# Altium PCB klor1_4.PcbDoc (part 1 of 3)
Units mm, origin at the board's own origin, x right, y up, seen from the top; angles counter-clockwise.
Board outline 323.11 x 118.19 mm, 2 copper layers (Top Layer, Bottom Layer); 176 components, 136 nets, 856 pads, 194 vias.
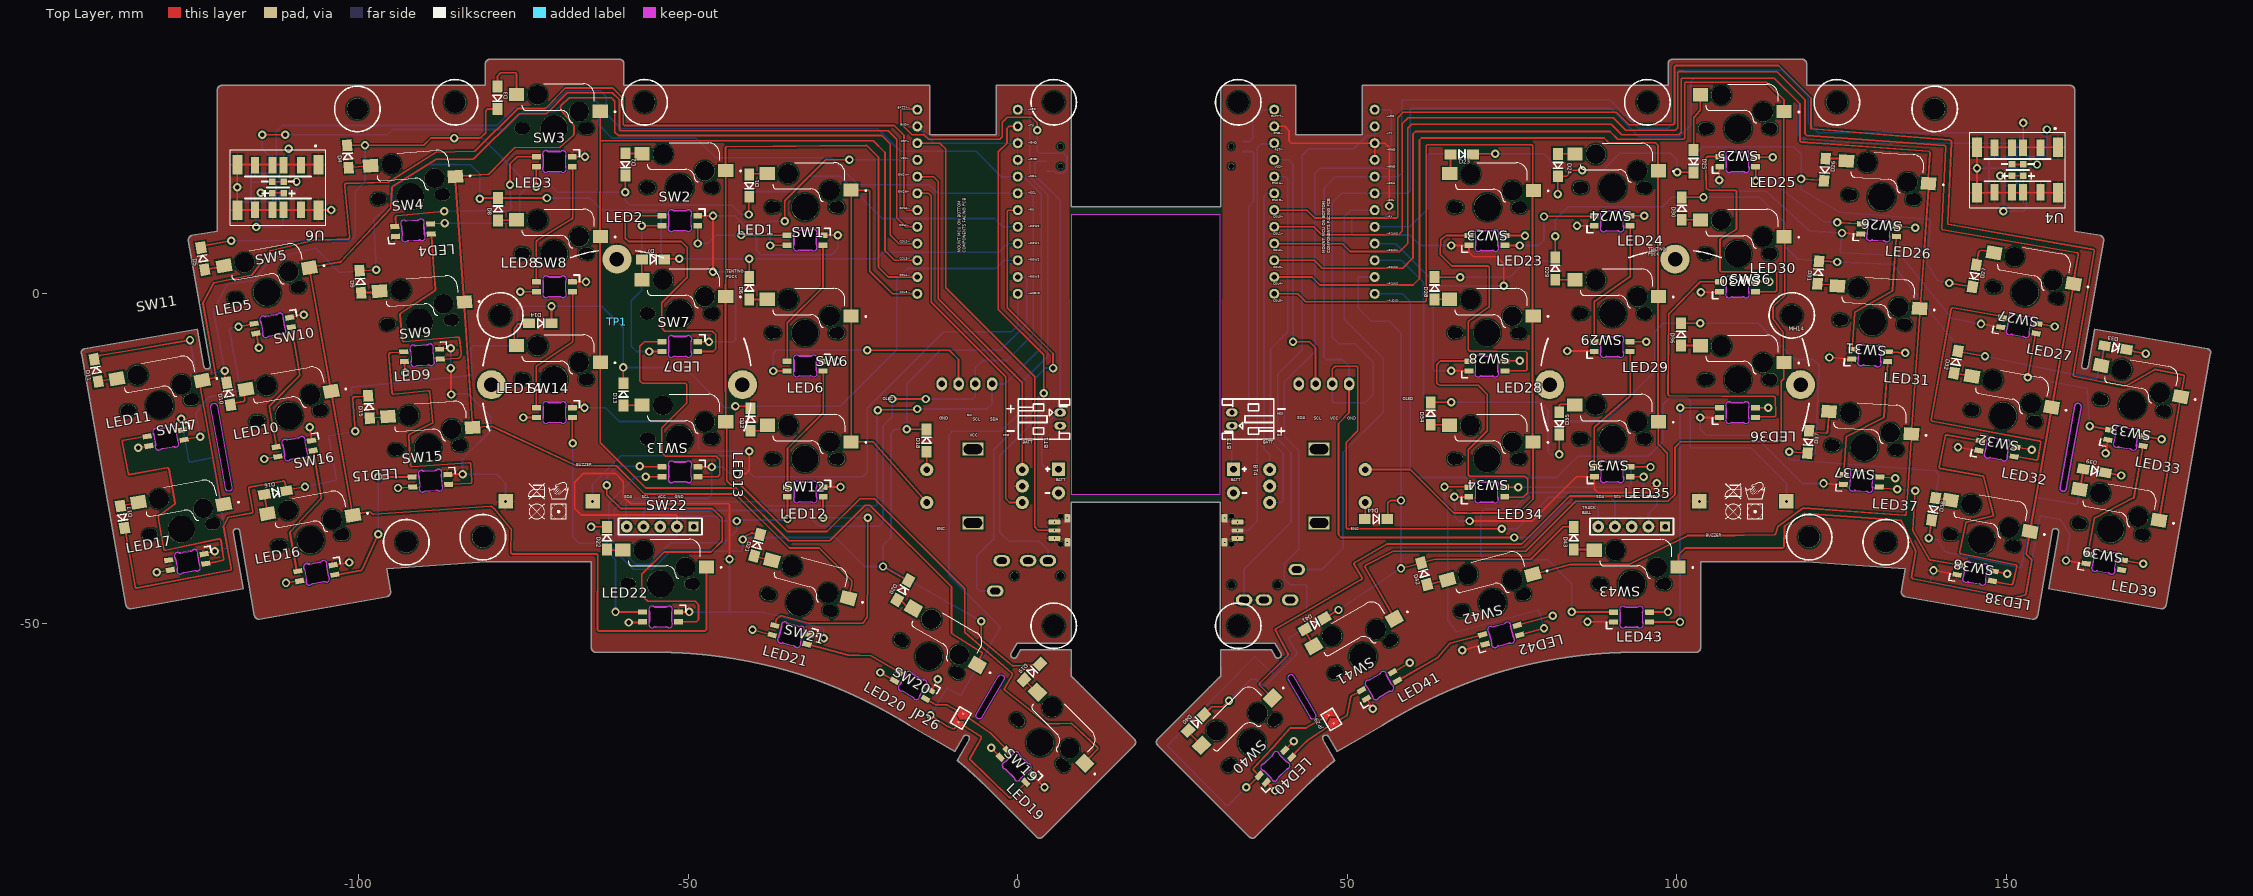
[diagram p0: Top Layer view]
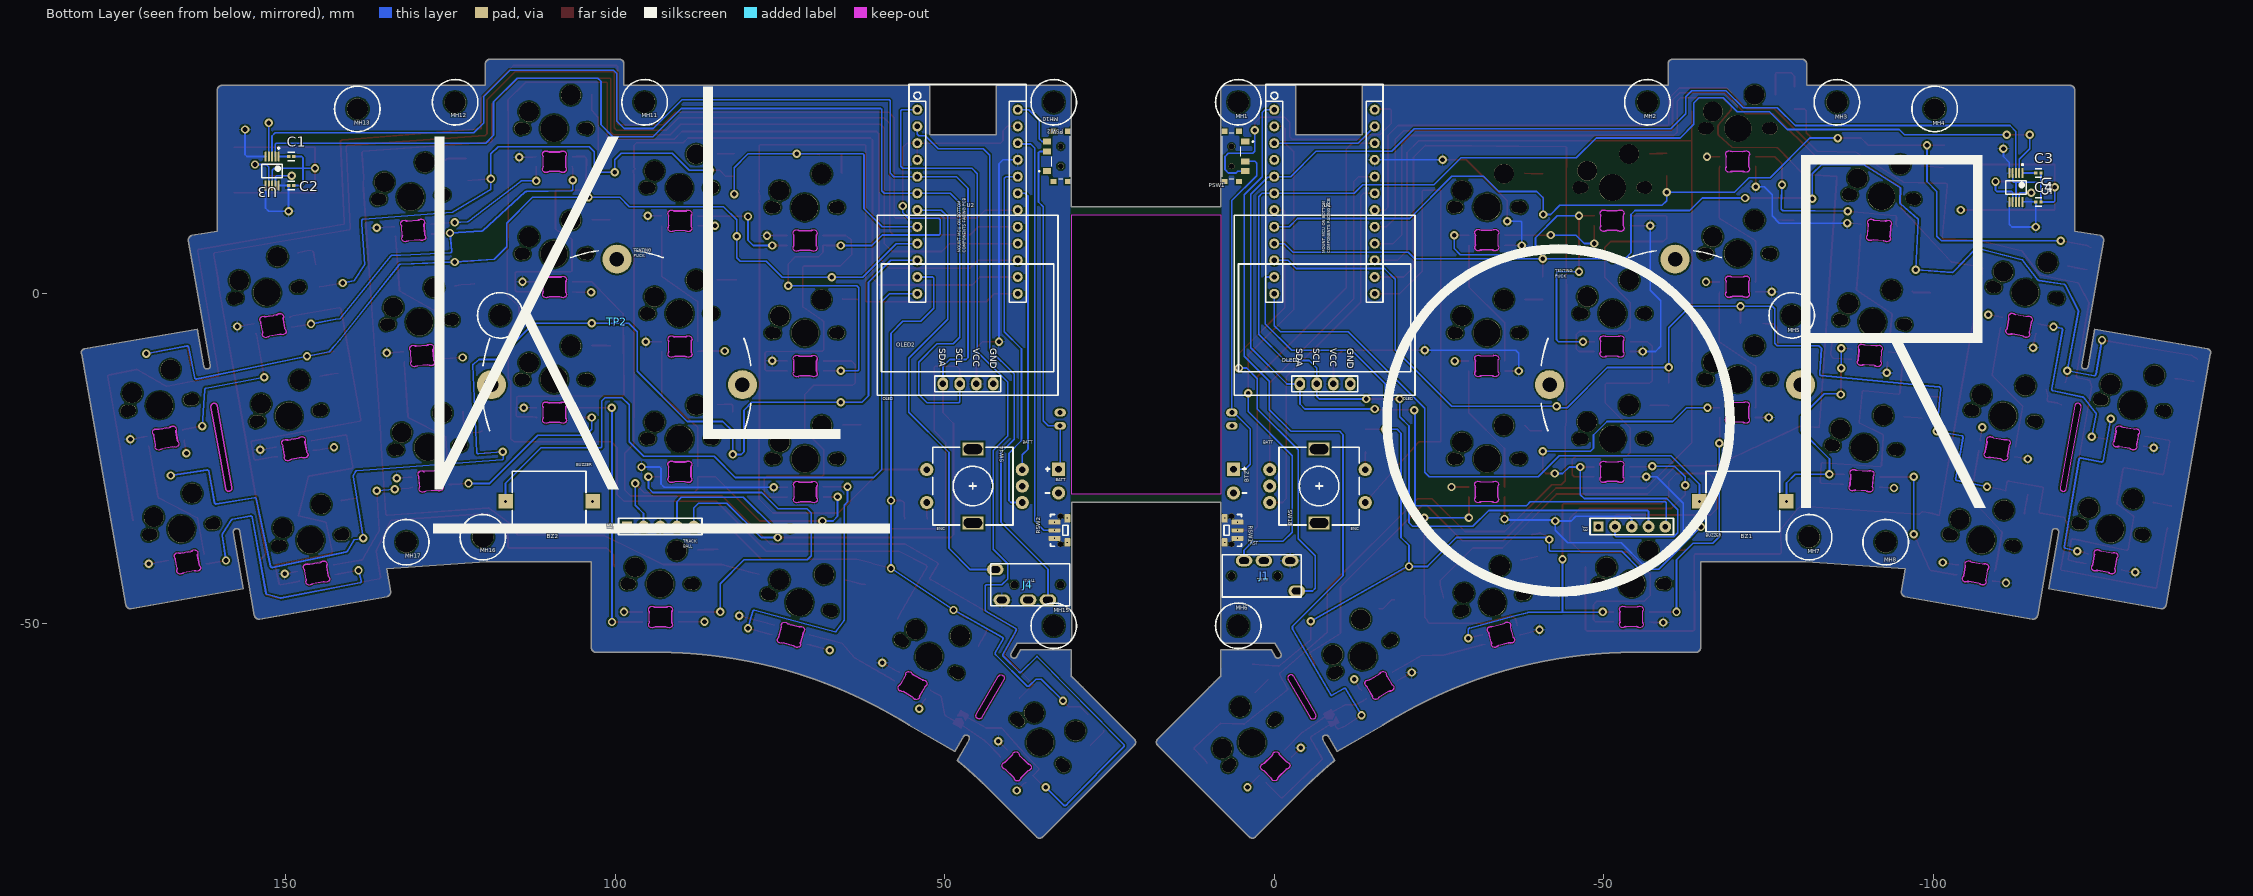
[diagram p1: Bottom Layer view, seen from below]
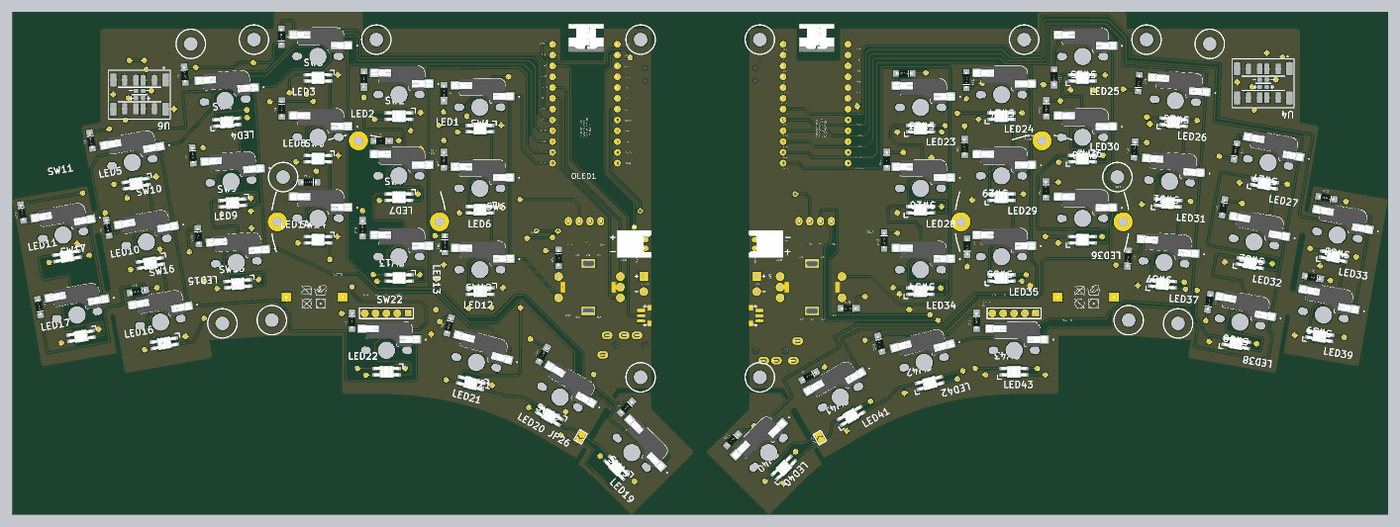
[diagram p4: 3D render of the assembled board from above, using the file's embedded part models]
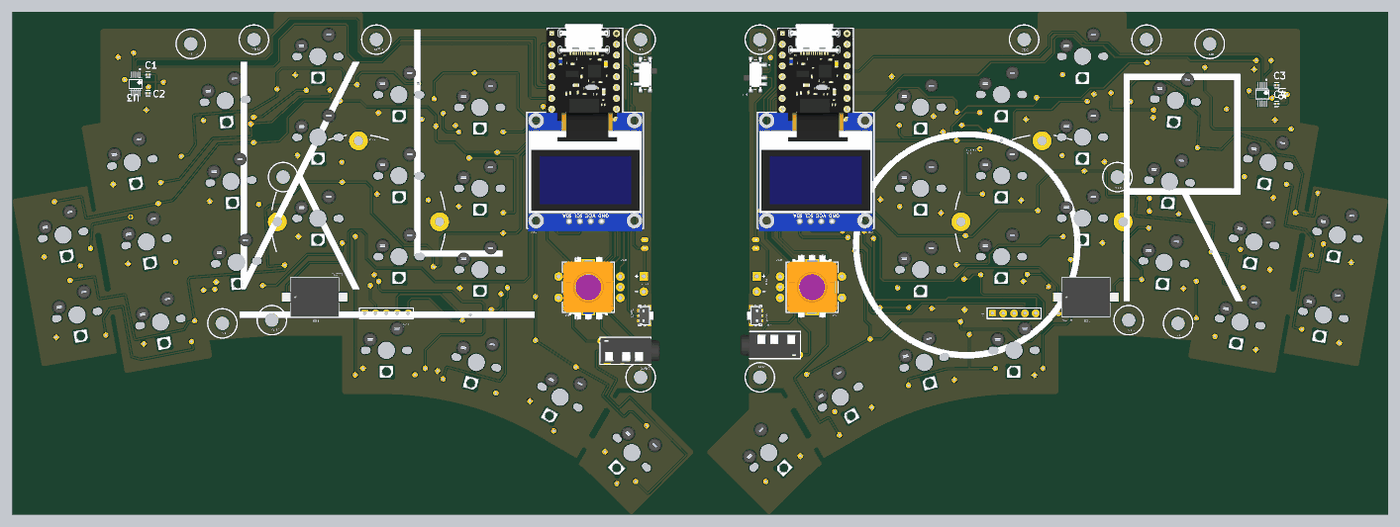
[diagram p5: 3D render of the assembled board from below, using the file's embedded part models]

## Layer stack, top to bottom
Top Solder: solder mask 0.0102, Solder Resist, Dk 3.5
Top Layer: signal copper 0.0356
Dielectric 1: dielectric 0.32, FR-4, Dk 4.8
Bottom Layer: signal copper 0.0356
Bottom Solder: solder mask 0.0102, Solder Resist, Dk 3.5

## Board outline
11385 vertices, not listed, extent -142.093,-82.603 181.013,35.584
cut-out: 938 vertices, not listed, extent 40.959,-64.517 45.263,-57.815
cut-out: 753 vertices, not listed, extent 158.153,-29.966 161.357,-16.614
cut-out: 938 vertices, not listed, extent 40.959,-64.517 45.263,-57.815
cut-out: 753 vertices, not listed, extent 158.153,-29.966 161.357,-16.614
cut-out: 30.761,-30.419 30.761,12.03 8.16,12.03 8.149,12.019 8.149,-30.429
cut-out: 938 vertices, not listed, extent -6.343,-64.517 -2.039,-57.815
cut-out: 753 vertices, not listed, extent -122.437,-29.966 -119.233,-16.614

## Design rules (kind name [scope] priority, off if disabled: settings)
BoardOutlineClearance BoardOutlineClearance_1 [(OnLayer('Bottom Overlay') OR OnLayer('Top Overlay'))] p1: gap=0 ignorepadtopadclearanceinfootprint=FALSE
BoardOutlineClearance MH [(HasFootprint('MOUNTINGHOLE_3.2MM_M3') OR HasFootprint('MountingHole_2.2mm_M2'))] p2: gap=0 ignorepadtopadclearanceinfootprint=FALSE
BoardOutlineClearance [All] p3: gap=0.05 ignorepadtopadclearanceinfootprint=FALSE
BoardOutlineClearance LED_CUTOUT [HasFootprint('SK6812MINI-E')] p4: gap=0.01 ignorepadtopadclearanceinfootprint=FALSE
Clearance HAPTIC_DRIVER [All vs HasFootprint('FP-DGS0010A-MFG')] p1: gap=0.1 ignorepadtopadclearanceinfootprint=TRUE
Clearance JUMPERS_RSW [All vs (HasFootprint('SW_PUSH_1P1T-MP_NO_HORIZONTAL_ALPS_SKRTLAE010_BOTH_SIDES') OR HasFootprint('SolderJumper-2_P1.3mm_Open_TrianglePad1.0x1.5mm'))] p2: gap=0.01 ignorepadtopadclearanceinfootprint=FALSE
Clearance LED [HasFootprint('SK6812MINI-E')] p3: gap=0.2 ignorepadtopadclearanceinfootprint=FALSE
Clearance [All] p4: gap=0.254 ignorepadtopadclearanceinfootprint=FALSE
HoleSize [All] p1: absolutevalues=TRUE maxlimit=5 minlimit=0.025 maxpercent=80.000 minpercent=20.000
HoleToHoleClearance SWITCH_SOCKET_PADS [All vs IsPad AND IsFree AND HoleSize=2] p1: gap=0 allowstackedmicrovias=TRUE
HoleToHoleClearance [All] p2: gap=0.254 allowstackedmicrovias=TRUE
MinimumSolderMaskSliver CHERRY_SW [HasFootprint('CHERRY-CPG151101S11')] p1: minsoldermaskwidth=0.01
MinimumSolderMaskSliver JUMPERS_RSW_1 [All vs (HasFootprint('SolderJumper-2_P1.3mm_Open_TrianglePad1.0x1.5mm') OR HasFootprint('SW_PUSH_1P1T-MP_NO_HORIZONTAL_ALPS_SKRTLAE010_BOTH_SIDES'))] p2: minsoldermaskwidth=0.01
MinimumSolderMaskSliver [All] p3: minsoldermaskwidth=0.15
PolygonConnect [All] p1: connectstyle=Relief reliefconductorwidth=0.254 reliefentries=4 polygonreliefangle="90 Angle" airgapwidth=0.254
RoutingVias [All] p1: holewidth=0.711 width=1.27 viastyle="Through Hole" minholewidth=0.711 minwidth=1.27 maxholewidth=0.711 maxwidth=1.27
SilkToSilkClearance [All] p1: silktosilkclearance=0
SilkToSolderMaskClearance [IsPad] p1: minsilkscreentomaskgap=0 clearancetoexposedcopper=TRUE
SolderMaskExpansion [All] p1: expansion=0.102 istentingtop=FALSE
SupplyNets "Schematic Supply Nets_5" [InNet('GND_l')] p1: voltage=0.000
SupplyNets "Schematic Supply Nets" [InNet('GND_R')] p2: voltage=0.000
SupplyNets "Schematic Supply Nets_4" [InNet('+BATT_L')] p3: voltage=0.000
SupplyNets "Schematic Supply Nets_3" [InNet('VCC_L')] p4: voltage=0.000
SupplyNets "Schematic Supply Nets_2" [InNet('+BATT')] p5: voltage=0.000
SupplyNets "Schematic Supply Nets_1" [InNet('VCC')] p6: voltage=0.000
Width [All] p1: maxlimit=0.5 minlimit=0.15 preferedwidth=0.254
25 further rules are at their usual default settings.

## Classes and differential pairs
component class klor1_4_R: BT1 BT2 BZ1 C3 C4 D1 D2 D3 D4 D5 D6 D7 D8 D9 D10 D11 D12 D13 D14 D15 D16 D17 D18 D19 D20 D21 D22 J1 J3 JP1 JP2 JP3 JP4 JP16 JP17 JP18 JP22 JP24 JP26 LED1 LED2 LED3 LED4 LED5 LED6 LED7 LED8 LED9 LED10 LED11 LED12 LED13 LED14 LED15 LED16 LED17 LED19 LED20 LED21 LED22 MH1 MH2 MH3 MH4 MH5 MH6 MH7 MH8 OLED1 PSW1 RSW1 SW1 SW2 SW3 SW4 SW5 SW6 SW7 SW8 SW9 SW10 SW11 SW12 SW13 SW14 SW15 SW16 SW17 SW18 SW19 SW20 SW21 SW22 TP2 U1 U5 U6
component class klor1_4_L: BT3 BT4 BZ2 C1 C2 D23 D24 D25 D26 D27 D28 D29 D30 D31 D32 D33 D34 D35 D36 D37 D38 D39 D40 D41 D42 D43 D44 J4 J5 JP10 JP11 JP29 JP30 JP31 JP34 JP35 JP39 JP45 JP47 JP48 JP49 JP50 LED23 LED24 LED25 LED26 LED27 LED28 LED29 LED30 LED31 LED32 LED33 LED34 LED35 LED36 LED37 LED38 LED39 LED40 LED41 LED42 LED43 MH10 MH11 MH12 MH13 MH14 MH15 MH16 MH17 OLED2 PSW2 RSW2 SW23 SW24 SW25 SW26 SW27 SW28 SW29 SW30 SW31 SW32 SW33 SW34 SW35 SW36 SW37 SW38 SW39 SW40 SW41 SW42 SW43 SW44 TP1 U2 U3 U4

## Components (designator, comment, footprint, x,y, rotation, side; value= is the part's Value field where it differs from the comment)
BT1 "JST Connector" JST_PH_2PINS 6.43,-18.02 r90 top locked
BT2 "Battery_Cell" custombatteryconnector_small 6.185,-28.42 r270 bottom locked
BT3 "JST Connector" JST_PH_2PINS 32.49,-20.02 r270 top locked
BT4 "Battery_Cell" custombatteryconnector_small 32.735,-28.42 r270 top locked
BZ1 "Buzzer" BUZZER_MALLORY_AST1109MLTRQ_REVERSIBLE -71.115,-31.51 r180 bottom locked
BZ2 "Buzzer" BUZZER_MALLORY_AST1109MLTRQ_REVERSIBLE 110.035,-31.51 r180 bottom locked
C1 "Capacitor" FP-C0402-BB-MFG 149.16,20.83 r180 bottom
C2 "Capacitor" FP-C0402-BB-MFG 149.16,16.43 r180 bottom
C3 "Capacitor" FP-C0402-BB-MFG -115.94,18.33 r180 bottom
C4 "Capacitor" FP-C0402-BB-MFG -115.94,13.93 r180 bottom
D1 "D_Small" DIODE_SOD123 -40.74,16.43 r90 top
D2 "D_Small" DIODE_SOD123 -59.54,19.63 r90 top
D3 "D_Small" DIODE_SOD123 -78.94,29.73 r90 top
D4 "D_Small" DIODE_SOD123 -101.64,20.83 r274 top
D5 "D_Small" DIODE_SOD123 -123.64,5.33 r280 top
D6 "D_Small" DIODE_SOD123 -40.74,0.83 r270 top
D7 "D_Small" DIODE_SOD123 -55.34,5.23 r180 top
D8 "D_Small" DIODE_SOD123 -78.84,12.83 r270 top
D9 "D_Small" DIODE_SOD123 -99.74,1.83 r274 top
D10 "D_Small" DIODE_SOD123 -119.74,-15.17 r280 top
D11 "D_Small" DIODE_SOD123 -139.83,-11.622 r280 top
D12 "D_Small" DIODE_SOD123 -40.54,-19.07 r270 top
D13 "D_Small" DIODE_SOD123 -59.84,-15.27 r270 top
D14 "D_Small" DIODE_SOD123 -72.44,-4.47 r180 top
D15 "D_Small" DIODE_SOD123 -98.44,-17.17 r274 top
D16 "D_Small" DIODE_SOD123 -112.64,-30.17 r190 top
D17 "D_Small" DIODE_SOD123 -135.84,-33.87 r100 top
D18 "D_Small" DIODE_SOD123 -13.84,-22.27 r270 top
D19 "D_Small" DIODE_SOD123 2.16,-57.37 r225 top
D20 "D_Small" DIODE_SOD123 -17.44,-44.97 r240 top
D21 "D_Small" DIODE_SOD123 -39.54,-38.17 r255 top
D22 "D_Small" DIODE_SOD123 -62.34,-37.07 r270 top
D23 "D_Small" DIODE_SOD123 67.36,21.13 r180 top
D24 "D_Small" DIODE_SOD123 81.96,19.53 r90 top
D25 "D_Small" DIODE_SOD123 102.56,20.13 r90 top
D26 "D_Small" DIODE_SOD123 122.46,18.83 r86 top
D27 "D_Small" DIODE_SOD123 145.16,2.73 r80 top
D28 "D_Small" DIODE_SOD123 63.26,0.83 r270 top
D29 "D_Small" DIODE_SOD123 81.56,3.83 r270 top
D30 "D_Small" DIODE_SOD123 100.76,12.93 r270 top
D31 "D_Small" DIODE_SOD123 121.46,3.23 r266 top
D32 "D_Small" DIODE_SOD123 142.36,-10.37 r260 top
D33 "D_Small" DIODE_SOD123 166.56,-8.17 r170 top
D34 "D_Small" DIODE_SOD123 62.66,-18.17 r270 top
D35 "D_Small" DIODE_SOD123 82.16,-19.67 r90 top
D36 "D_Small" DIODE_SOD123 100.66,-6.17 r270 top
D37 "D_Small" DIODE_SOD123 119.96,-22.47 r86 top
D38 "D_Small" DIODE_SOD123 138.96,-32.67 r80 top
D39 "D_Small" DIODE_SOD123 163.36,-26.87 r170 top
D40 "D_Small" DIODE_SOD123 27.06,-65.07 r225 top
D41 "D_Small" DIODE_SOD123 45.06,-50.07 r210 top
D42 "D_Small" DIODE_SOD123 61.66,-42.47 r285 top
D43 "D_Small" DIODE_SOD123 84.36,-37.07 r270 top
D44 "D_Small" DIODE_SOD123 54.36,-34.17 r180 top
J1 "MJ-4PP-9" MJ-4PP-9 7.88,-42.595 r90 bottom locked
J3 "lv27" lvc27_onlyInput -49.17,-35.32 r90 bottom locked
J4 "MJ-4PP-9" MJ-4PP-9 31.04,-44.345 r270 bottom
J5 "lv2" lvc27_onlyInput 98.24,-35.32 r90 bottom locked value=lv27
JP26 "Device_Jumper_NO_Small" SolderJumper-2_P1.3mm_Open_TrianglePad1.0x1.5mm -8.64,-64.37 r60 top
JP29 "Device_Jumper_NO_Small" SOLDERJUMPER-2_P1.3MM_OPEN_TRIANGLEPAD1.0X1.5MM 47.56,-64.57 r300 top
LED1 "SK6812MINI-E" SK6812MINI-E#1 -32.262,8.136 r180 top locked
LED2 "SK6812MINI-E" SK6812MINI-E#1 -51.283,11.077 r180 top locked
LED3 "SK6812MINI-E" SK6812MINI-E#1 -70.323,20.057 r180 top locked
LED4 "SK6812MINI-E" SK6812MINI-E#2 -91.751,9.631 r4 top locked
LED5 "SK6812MINI-E" SK6812MINI-E#3 -113.036,-4.802 r190 top locked
LED6 "SK6812MINI-E" SK6812MINI-E#1 -32.26,-10.958 r180 top locked
LED7 "SK6812MINI-E" SK6812MINI-E#1 -51.273,-8.003 r180 top locked
LED8 "SK6812MINI-E" SK6812MINI-E#1 -70.309,1.052 r180 top locked
LED9 "SK6812MINI-E" SK6812MINI-E#1 -90.391,-9.349 r184 top locked
LED10 "SK6812MINI-E" SK6812MINI-E#3 -109.713,-23.5 r190 top locked
LED11 "SK6812MINI-E" SK6812MINI-E#3 -129.296,-21.882 r190 top locked
LED12 "SK6812MINI-E" SK6812MINI-E#1 -32.243,-30.073 r180 top locked
LED13 "SK6812MINI-E" SK6812MINI-E#1 -51.259,-27.021 r180 top locked
LED14 "SK6812MINI-E" SK6812MINI-E#1 -70.309,-18.021 r180 top locked
LED15 "SK6812MINI-E" SK6812MINI-E#1 -89.131,-28.379 r184 top locked
LED16 "SK6812MINI-E" SK6812MINI-E#3 -106.426,-42.362 r190 top locked
LED17 "SK6812MINI-E" SK6812MINI-E#3 -126.016,-40.682 r190 top locked
LED19 "SK6812MINI-E" SK6812MINI-E#1 -0.172,-71.688 r135 top locked
LED20 "SK6812MINI-E" SK6812MINI-E#4 -15.97,-59.435 r150 top locked
LED21 "SK6812MINI-E" SK6812MINI-E#1 -34.422,-51.746 r165 top locked
LED22 "SK6812MINI-E" SK6812MINI-E#1 -54.197,-49.03 r180 top locked
LED23 "SK6812MINI-E" SK6812MINI-E#1 71.203,8.097 r0 top locked
LED24 "SK6812MINI-E" SK6812MINI-E#1 90.203,11.077 r0 top locked
LED25 "SK6812MINI-E" SK6812MINI-E#1 109.243,20.057 r0 top locked
LED26 "SK6812MINI-E" SK6812MINI-E#1 130.671,9.631 r356 top locked
LED27 "SK6812MINI-E" SK6812MINI-E#1 151.956,-4.802 r350 top locked
LED28 "SK6812MINI-E" SK6812MINI-E#1 71.18,-10.958 r0 top locked
LED29 "SK6812MINI-E" SK6812MINI-E#1 90.193,-8.003 r0 top locked
LED30 "SK6812MINI-E" SK6812MINI-E#1 109.229,1.052 r0 top locked
LED31 "SK6812MINI-E" SK6812MINI-E#1 129.311,-9.349 r356 top locked
LED32 "SK6812MINI-E" SK6812MINI-E#1 148.633,-23.5 r350 top locked
LED33 "SK6812MINI-E" SK6812MINI-E#1 168.216,-21.882 r350 top locked
LED34 "SK6812MINI-E" SK6812MINI-E#1 71.163,-30.073 r0 top locked
LED35 "SK6812MINI-E" SK6812MINI-E#1 90.21,-26.995 r0 top locked
LED36 "SK6812MINI-E" SK6812MINI-E#1 109.229,-18.021 r0 top locked
LED37 "SK6812MINI-E" SK6812MINI-E#1 128.051,-28.379 r356 top locked
LED38 "SK6812MINI-E" SK6812MINI-E#1 145.346,-42.362 r350 top locked
LED39 "SK6812MINI-E" SK6812MINI-E#1 164.936,-40.682 r350 top locked
LED40 "SK6812MINI-E" SK6812MINI-E#1 39.092,-71.688 r45 top locked
LED41 "SK6812MINI-E" SK6812MINI-E#1 54.89,-59.435 r30 top locked
LED42 "SK6812MINI-E" SK6812MINI-E#1 73.353,-51.736 r15 top locked
LED43 "SK6812MINI-E" SK6812MINI-E#1 93.143,-49.043 r0 top locked
MH1 "MountingHole_3.2mm_M3" MOUNTINGHOLE_3.2MM_M3 5.46,29.06 r180 bottom locked
MH2 "MountingHole_3.2mm_M3" MOUNTINGHOLE_3.2MM_M3 -56.62,29.06 r180 bottom locked
MH3 "MountingHole_3.2mm_M3" MOUNTINGHOLE_3.2MM_M3 -85.37,29.06 r180 bottom locked
MH4 "MountingHole_3.2mm_M3" MOUNTINGHOLE_3.2MM_M3 -100.21,28.05 r180 bottom locked
MH5 "MountingHole_3.2mm_M3" MOUNTINGHOLE_3.2MM_M3 -78.52,-3.27 r180 bottom locked
MH6 "MountingHole_3.2mm_M3" MOUNTINGHOLE_3.2MM_M3 5.46,-50.37 r180 bottom locked
MH7 "MountingHole_3.2mm_M3" MOUNTINGHOLE_3.2MM_M3 -81.17,-36.93 r180 bottom locked
MH8 "MountingHole_3.2mm_M3" MOUNTINGHOLE_3.2MM_M3 -92.78,-37.69 r180 bottom locked
MH10 "MountingHole_3.2mm_M3" MOUNTINGHOLE_3.2MM_M3 33.46,29.06 r180 bottom locked
MH11 "MountingHole_3.2mm_M3" MOUNTINGHOLE_3.2MM_M3 95.54,29.06 r180 bottom locked
MH12 "MountingHole_3.2mm_M3" MOUNTINGHOLE_3.2MM_M3 124.29,29.06 r180 bottom locked
MH13 "MountingHole_3.2mm_M3" MOUNTINGHOLE_3.2MM_M3 139.13,28.05 r180 bottom locked
MH14 "MountingHole_3.2mm_M3" MOUNTINGHOLE_3.2MM_M3 117.44,-3.27 r0 top locked
MH15 "MountingHole_3.2mm_M3" MOUNTINGHOLE_3.2MM_M3 33.46,-50.37 r0 bottom locked
MH16 "MountingHole_3.2mm_M3" MOUNTINGHOLE_3.2MM_M3 120.09,-36.93 r180 bottom locked
MH17 "MountingHole_3.2mm_M3" MOUNTINGHOLE_3.2MM_M3 131.7,-37.69 r180 bottom locked
OLED1 "SSD1306" SSD1306_128X64OLED -7.899,-3.075 r0 bottom locked
OLED2 "SSD1306" SSD1306_128X64OLED 46.269,-3.075 r0 bottom locked
PSW1 "SW_DPDT_x2" SW_MSK12C02 6.479,20.854 r270 bottom
PSW2 "SW_DPDT_x2" SW_MSK12C02 32.391,20.854 r90 bottom
RSW1 "SW_Push" SW_PUSH_1P1T-MP_NO_HORIZONTAL_ALPS_SKRTLAE010_BOTH_SIDES 6.47,-35.88 r270 bottom locked
RSW2 "SW_Push" SW_PUSH_1P1T-MP_NO_HORIZONTAL_ALPS_SKRTLAE010_BOTH_SIDES 32.45,-35.88 r90 bottom locked
SW1 "SW_PUSH-MX" CHERRY-CPG151101S11 -31.67,16.96 r180 top locked
SW2 "SW_PUSH-MX" CHERRY-CPG151101S11 -50.67,19.94 r180 top locked
SW3 "SW_PUSH-MX" CHERRY-CPG151101S11 -69.71,28.92 r180 top locked
SW4 "SW_PUSH-MX" CHERRY-CPG151101S11 -91.772,18.575 r184 top locked
SW5 "SW_PUSH-MX" CHERRY-CPG151101S11 -113.971,4.032 r190 top locked
SW6 "SW_PUSH-MX" CHERRY-CPG151101S11 -31.668,-2.133 r180 top locked
SW7 "SW_PUSH-MX" CHERRY-CPG151101S11 -50.681,0.822 r180 top locked
SW8 "SW_PUSH-MX" CHERRY-CPG151101S11 -69.696,9.915 r180 top locked
SW9 "SW_PUSH-MX" CHERRY-CPG151101S11 -90.397,-0.465 r184 top locked
SW10 "SW_PUSH-MX" CHERRY-CPG151101S11 -110.648,-14.665 r190 top locked
SW11 "SW_PUSH-MX" CHERRY-CPG151101S11 -130.231,-13.048 r190 top locked
SW12 "SW_PUSH-MX" CHERRY-CPG151101S11 -31.651,-21.248 r180 top locked
SW13 "SW_PUSH-MX" CHERRY-CPG151101S11 -50.667,-18.196 r180 top locked
SW14 "SW_PUSH-MX" CHERRY-CPG151101S11 -69.696,-9.158 r180 top locked
SW15 "SW_PUSH-MX" CHERRY-CPG151101S11 -89.137,-19.495 r184 top locked
SW16 "SW_PUSH-MX" CHERRY-CPG151101S11 -107.361,-33.528 r190 top locked
SW17 "SW_PUSH-MX" CHERRY-CPG151101S11 -126.951,-31.848 r190 top locked
SW18 "RotaryEncoder_Switch" RotaryEncoder_Alps_EC11E-Switch_Vertical_H20mm-keebio_modified -6.81,-29.17 r270 bottom
SW19 "SW_PUSH-MX" CHERRY-CPG151101S11 6.528,-65.855 r135 top locked
SW20 "SW_PUSH-MX" CHERRY-CPG151101S11 -11.008,-52.066 r150 top locked
SW21 "SW_PUSH-MX" CHERRY-CPG151101S11 -31.536,-43.344 r165 top locked
SW22 "SW_PUSH-MX" CHERRY-CPG151101S11 -53.604,-40.206 r180 top locked
SW23 "SW_PUSH-MX" CHERRY-CPG151101S11 71.881,16.922 r180 top locked
SW24 "SW_PUSH-MX" CHERRY-CPG151101S11 90.881,19.902 r180 top locked
SW25 "SW_PUSH-MX" CHERRY-CPG151101S11 109.921,28.882 r180 top locked
SW26 "SW_PUSH-MX" CHERRY-CPG151101S11 131.944,18.426 r176 top locked
SW27 "SW_PUSH-MX" CHERRY-CPG151101S11 154.142,3.812 r170 top locked
SW28 "SW_PUSH-MX" CHERRY-CPG151101S11 71.858,-2.133 r180 top locked
SW29 "SW_PUSH-MX" CHERRY-CPG151101S11 90.871,0.822 r180 top locked
SW30 "SW_PUSH-MX" CHERRY-CPG151101S11 109.907,9.876 r180 top locked
SW31 "SW_PUSH-MX" CHERRY-CPG151101S11 130.584,-0.554 r176 top locked
SW32 "SW_PUSH-MX" CHERRY-CPG151101S11 150.819,-14.886 r170 top locked
SW33 "SW_PUSH-MX" CHERRY-CPG151101S11 170.402,-13.268 r170 top locked
SW34 "SW_PUSH-MX" CHERRY-CPG151101S11 71.841,-21.248 r180 top locked
SW35 "SW_PUSH-MX" CHERRY-CPG151101S11 90.857,-18.196 r180 top locked
SW36 "SW_PUSH-MX" CHERRY-CPG151101S11 109.907,-9.196 r180 top locked
SW37 "SW_PUSH-MX" CHERRY-CPG151101S11 129.324,-19.584 r176 top locked
SW38 "SW_PUSH-MX" CHERRY-CPG151101S11 147.532,-33.748 r170 top locked
SW39 "SW_PUSH-MX" CHERRY-CPG151101S11 167.122,-32.068 r170 top locked
SW40 "SW_PUSH-MX" CHERRY-CPG151101S11 33.29,-64.957 r225 top locked
SW41 "SW_PUSH-MX" CHERRY-CPG151101S11 51.028,-51.431 r210 top locked
SW42 "SW_PUSH-MX" CHERRY-CPG151101S11 71.682,-43.015 r195 top locked
SW43 "SW_PUSH-MX" CHERRY-CPG151101S11 93.821,-40.218 r180 top locked
SW44 "RotaryEncoder_Switch" RotaryEncoder_Alps_EC11E-Switch_Vertical_H20mm-keebio_modified 45.73,-29.17 r90 bottom
TP1 "tenting-puck" SplitkbTentingPuckWithoutCenterHole -60.815,-13.79 r270 top locked
TP2 "tenting-puck" SplitkbTentingPuckWithoutCenterHole 99.735,-13.79 r270 bottom locked
U1 "ProMicro" ProMicro -7.719,14.366 r180 bottom
U2 "ProMicro" ProMicro 46.441,14.366 r180 bottom
U3 "DRV2605LTDGSRQ1" FP-DGS0010A-MFG 152.06,18.63 r180 bottom
U4 "ELV1411A" SMD-16_ELV1411A 151.71,18.78 r180 top
U5 "DRV2605LTDGSRQ1" FP-DGS0010A-MFG -112.54,16.13 r180 bottom
U6 "ELV1411A" SMD-16_ELV1411A -112.24,16.13 r180 top

## Footprints (in the part's own frame and the unit in brackets; to place one, negate y for a bottom-side part, rotate by r counter-clockwise, add the part's x,y. Pads: shape width x height; smd on the part's side, far side on the other; paste and mask are expansions set on the pad)
BUZZER_MALLORY_AST1109MLTRQ_REVERSIBLE [mm]
  rect 2.2x2.2 hole 0.5 mask+0: 1(-6.6,0) 2(6.6,0)
  silkscreen extent -5.6,-4.6 5.6,4.6, body extent -7.65,-4.65 7.65,4.65, height 2.01
CHERRY-CPG151101S11 [mm]
  rect 2.3x2 smd mask+0: 1(-6.365,1.23) 2(6.335,-1.31)
  round 3 hole 3 unplated: ""(-3.175,1.27) ""(3.175,-1.27)
  silkscreen extent -8.7,-2.95 5.45,2.94, body extent -7.25,-2.95 7.25,2.95, height 1.85
custombatteryconnector_small [mm]
  rrect7% 2x2 hole 1 mask+0: 1(-1.8,0)
  round 2 hole 1 mask+0: 2(1.8,0)
DIODE_SOD123 [mm]
  rect 1.8x1.5 smd mask+0: 1(-1.7,0) 2(1.7,0)
  silkscreen extent -0.5,-0.7 0.4,0.7, body extent -1.88,-0.85 1.88,0.85, height 1.2
FP-C0402-BB-MFG [mm]
  rect 0.52x0.52 smd paste+0 mask+0: 1(-0.4,0) 2(0.4,0)
  silkscreen extent -0.5,-0.64 0.5,0.64, body extent -0.5,-0.25 0.5,0.25, height 0.55
FP-DGS0010A-MFG [mm]
  rrect33% 0.3x1.45 smd paste+0 mask+0: 1(1,2.2) 2(0.5,2.2) 3(0,2.2) 4(-0.5,2.2) 5(-1,2.2) 6(-1,-2.2) 7(-0.5,-2.2) 8(0,-2.2) 9(0.5,-2.2) 10(1,-2.2)
  silkscreen extent -1.55,-1.05 1.55,3.6, body extent -1.5,-2.45 1.5,2.45, height 1.1
JST_PH_2PINS [mm]
  rrect100% 1.2x1.75 hole 0.75 paste-2539.97 mask+0: 1(0,0) 2(-2,0)
  silkscreen extent -4.06,-1.46 2.06,6.36, body extent -3.95,-1.35 1.95,6.25, height 4.81
lvc27_onlyInput [mm]
  rect 1.524x1.524 hole 0.85 mask+0: 1(0,0)
  round 1.8 hole 0.85 mask+0: 2(0,-2.54) 3(0,-5.08) 4(0,-7.62) 5(0,-10.16)
  silkscreen extent -1.25,-11.4 1.25,1.25
MJ-4PP-9 [mm]
  rrect100% 1.7x2.5 hole 1.5 slot 1 at 0 deg paste-2539.97 mask+0: 1(2.1,-10.3) 2(2.1,-6.3) 3(-2.5,-11.3) 4(2.1,-3.3)
  round 1.2 hole 1.2 paste-2539.97 mask+0: Un3(-0.2,-1.4) Un4(-0.2,-8.4)
  silkscreen extent -3.4,-12 3,0, body extent -3.21,-11.91 2.83,2.11, height 5.01
MOUNTINGHOLE_3.2MM_M3 [mm]
  round 3.2 hole 3.2 paste-2539.97 mask+0: Un1(0,0)
  silkscreen extent -3.45,-3.45 3.45,3.45
ProMicro [mil]
  round 60 hole 32 paste-99999 mask+0: 1(-303.89,534.42) 2(-303.89,434.42) 3(-303.89,334.42) 4(-303.89,234.42) 5(-303.89,134.42) 6(-303.89,34.42) 7(-303.89,-65.58) 8(-303.89,-165.58) 9(-303.89,-265.58) 10(-303.89,-365.58) 11(-303.89,-465.58) 12(-303.89,-565.58) 13(296.11,-565.58) 14(296.11,-465.58) 15(296.11,-365.58) 16(296.11,-265.58) 17(296.11,-165.58) 18(296.11,-65.58) 19(296.11,34.42) 20(296.11,134.42) 21(296.11,234.42) 22(296.11,334.42) 23(296.11,434.42) 24(296.11,534.42)
  silkscreen extent -354,-616 346,684, body extent -362,-623 339,721, height 99
RotaryEncoder_Alps_EC11E-Switch_Vertical_H20mm-keebio_modified [mm]
  round 2 hole 1 paste-2539.97 mask+0: A(-2.5,-7.5) B(2.5,-7.5) C(0,-7.5) S1(2.5,7) S2(-2.5,7)
  rect 2x3.2 hole 1.5 slot 2.8 at 90 deg paste-2539.97 mask+0: MP(-5.6,0) MP(5.6,0)
  silkscreen extent -5.9,-6.1 5.9,6.1, body extent -6.55,-7.73 6.55,7.22, height 19.51
SK6812MINI-E#1 [mm]
  rrect10% 1.35x0.82 smd mask+0: 1(2.725,-0.75) 2(-2.725,-0.75) 3(-2.725,0.75) 4(2.725,0.75)
  Keep-Out Layer board cut-out: 1.661,-0.746 1.661,0.659 1.651,0.659 1.651,0.659 1.69,0.855 1.706,0.878 1.715,0.874 1.731,0.898 1.77,1.093 1.731,1.288 1.62,1.454 1.455,1.564 1.26,1.603 1.065,1.564 1.007,1.526 1.008,1.525 1.008,1.524 0.95,1.486 0.755,1.447 0.755,1.447 0.755,1.457 -0.834,1.457 -0.834,1.457 -0.834,1.447 -1.029,1.486 -1.086,1.524 -1.085,1.526 -1.143,1.564 -1.338,1.603 -1.533,1.564 -1.699,1.454 -1.809,1.288 -1.848,1.093 -1.809,0.898 -1.793,0.874 -1.789,0.876 -1.784,0.878 -1.768,0.855 -1.729,0.659 -1.739,0.659 -1.739,-0.746 -1.739,-0.746 -1.729,-0.746 -1.768,-0.941 -1.784,-0.965 -1.789,-0.963 -1.793,-0.961 -1.809,-0.985 -1.848,-1.18 -1.809,-1.375 -1.699,-1.54 -1.533,-1.651 -1.338,-1.69 -1.143,-1.651 -1.085,-1.612 -1.086,-1.611 -1.029,-1.572 -0.834,-1.534 -0.834,-1.534 -0.834,-1.543 0.755,-1.543 0.755,-1.543 0.755,-1.534 0.95,-1.572 1.008,-1.611 1.007,-1.612 1.065,-1.651 1.26,-1.69 1.455,-1.651 1.62,-1.54 1.731,-1.375 1.77,-1.18 1.731,-0.985 1.715,-0.961 1.706,-0.965 1.69,-0.941 1.651,-0.746 1.651,-0.746 1.661,-0.746
  Keep-Out Layer lines w0.05: 1.042,1.572 cw(c0.79,2.004) 0.79,1.504 ; 1.042,1.572 cw(c1.294,1.141) 1.745,0.924 ccw(c2.195,0.707) 1.695,0.707 1.695,-0.699 ccw(c2.195,-0.699) 1.745,-0.916 cw(c1.294,-1.132) 1.042,-1.564 ccw(c0.79,-1.996) 0.79,-1.496 ; 1.042,1.572 1.042,1.572 ; 0.79,1.504 -0.799,1.504 ; 0.79,1.504 0.79,1.504 ; 0.79,-1.496 0.79,-1.496 ; 0.79,-1.496 -0.799,-1.496 ; -0.799,1.504 cw(c-0.799,2.004) -1.051,1.572 ccw(c-1.304,1.141) -1.754,0.924 ; -0.799,1.504 -0.799,1.504 ; -0.799,-1.496 ccw(c-0.799,-1.996) -1.051,-1.564 cw(c-1.304,-1.132) -1.754,-0.916 ccw(c-2.205,-0.699) -1.705,-0.699 ; -0.799,-1.496 -0.799,-1.496 ; -1.705,-0.699 -1.705,-0.699 ; -1.705,-0.699 -1.705,0.707 ccw(c-2.205,0.707) -1.754,0.924 ; -1.754,0.924 -1.754,0.924
  silkscreen extent -3.82,-1.79 -2.92,-0.79, body extent -2.94,-1.4 2.94,1.4, height 0.95
SK6812MINI-E#2 [mm]
  rrect10% 1.35x0.82 smd mask+0: 1(2.725,-0.75) 2(-2.725,-0.75) 3(-2.725,0.75) 4(2.725,0.75)
  Keep-Out Layer board cut-out: 1.661,-0.746 1.661,0.659 1.651,0.659 1.651,0.659 1.69,0.855 1.706,0.878 1.715,0.874 1.731,0.898 1.77,1.093 1.731,1.288 1.62,1.454 1.455,1.564 1.26,1.603 1.065,1.564 1.007,1.526 1.008,1.525 1.008,1.524 0.95,1.486 0.755,1.447 0.755,1.447 0.755,1.457 -0.834,1.457 -0.834,1.457 -0.834,1.447 -1.029,1.486 -1.086,1.524 -1.085,1.526 -1.143,1.564 -1.338,1.603 -1.533,1.564 -1.699,1.454 -1.809,1.288 -1.848,1.093 -1.809,0.898 -1.793,0.874 -1.789,0.876 -1.784,0.878 -1.768,0.855 -1.729,0.659 -1.739,0.659 -1.739,-0.746 -1.739,-0.746 -1.729,-0.746 -1.768,-0.941 -1.784,-0.965 -1.789,-0.963 -1.793,-0.961 -1.809,-0.985 -1.848,-1.18 -1.809,-1.375 -1.699,-1.54 -1.533,-1.651 -1.338,-1.69 -1.143,-1.651 -1.085,-1.612 -1.086,-1.611 -1.029,-1.572 -0.834,-1.534 -0.834,-1.534 -0.834,-1.543 0.755,-1.543 0.755,-1.543 0.755,-1.534 0.95,-1.572 1.008,-1.611 1.007,-1.612 1.065,-1.651 1.26,-1.69 1.455,-1.651 1.62,-1.54 1.731,-1.375 1.77,-1.18 1.731,-0.985 1.715,-0.961 1.706,-0.965 1.69,-0.941 1.651,-0.746 1.651,-0.746 1.661,-0.746
  Keep-Out Layer lines w0.05: -1.754,0.924 cw(c-2.205,0.707) -1.705,0.707 -1.705,-0.699 ; -1.754,0.924 cw(c-1.304,1.141) -1.051,1.572 ccw(c-0.799,2.004) -0.799,1.504 0.79,1.504 ; -1.754,0.924 -1.754,0.924 ; -1.705,-0.699 cw(c-2.205,-0.699) -1.754,-0.916 ccw(c-1.304,-1.132) -1.051,-1.564 cw(c-0.799,-1.996) -0.799,-1.496 ; -1.705,-0.699 -1.705,-0.699 ; -0.799,-1.496 0.79,-1.496 ; -0.799,-1.496 -0.799,-1.496 ; 0.79,1.504 ccw(c0.79,2.004) 1.042,1.572 ; 0.79,1.504 0.79,1.504 ; 0.79,-1.496 cw(c0.79,-1.996) 1.042,-1.564 ccw(c1.294,-1.132) 1.745,-0.916 cw(c2.195,-0.699) 1.695,-0.699 1.695,0.707 cw(c2.195,0.707) 1.745,0.924 ccw(c1.294,1.141) 1.042,1.572 ; 0.79,-1.496 0.79,-1.496 ; 1.042,1.572 1.042,1.572
  silkscreen extent -3.82,-1.79 -2.92,-0.79, body extent -2.94,-1.4 2.94,1.4, height 0.95
SK6812MINI-E#3 [mm]
  rrect10% 1.35x0.82 smd mask+0: 1(2.725,-0.75) 2(-2.725,-0.75) 3(-2.725,0.75) 4(2.725,0.75)
  Keep-Out Layer board cut-out: 1.661,-0.746 1.661,0.659 1.651,0.659 1.651,0.659 1.69,0.855 1.706,0.878 1.715,0.874 1.731,0.898 1.77,1.093 1.731,1.288 1.62,1.454 1.455,1.564 1.26,1.603 1.065,1.564 1.007,1.526 1.008,1.525 1.008,1.524 0.95,1.486 0.755,1.447 0.755,1.447 0.755,1.457 -0.834,1.457 -0.834,1.457 -0.834,1.447 -1.029,1.486 -1.086,1.524 -1.085,1.526 -1.143,1.564 -1.338,1.603 -1.533,1.564 -1.699,1.454 -1.809,1.288 -1.848,1.093 -1.809,0.898 -1.793,0.874 -1.789,0.876 -1.784,0.878 -1.768,0.855 -1.729,0.659 -1.739,0.659 -1.739,-0.746 -1.739,-0.746 -1.729,-0.746 -1.768,-0.941 -1.784,-0.965 -1.789,-0.963 -1.793,-0.961 -1.809,-0.985 -1.848,-1.18 -1.809,-1.375 -1.699,-1.54 -1.533,-1.651 -1.338,-1.69 -1.143,-1.651 -1.085,-1.612 -1.086,-1.611 -1.029,-1.572 -0.834,-1.534 -0.834,-1.534 -0.834,-1.543 0.755,-1.543 0.755,-1.543 0.755,-1.534 0.95,-1.572 1.008,-1.611 1.007,-1.612 1.065,-1.651 1.26,-1.69 1.455,-1.651 1.62,-1.54 1.731,-1.375 1.77,-1.18 1.731,-0.985 1.715,-0.961 1.706,-0.965 1.69,-0.941 1.651,-0.746 1.651,-0.746 1.661,-0.746
  Keep-Out Layer lines w0.05: 0.79,-1.496 cw(c0.79,-1.996) 1.042,-1.564 ccw(c1.294,-1.132) 1.745,-0.916 cw(c2.195,-0.699) 1.695,-0.699 1.695,0.707 cw(c2.195,0.707) 1.745,0.924 ccw(c1.294,1.141) 1.042,1.572 ; 0.79,-1.496 -0.799,-1.496 ; 0.79,-1.496 0.79,-1.496 ; 1.042,1.572 cw(c0.79,2.004) 0.79,1.504 -0.799,1.504 ; 1.042,1.572 1.042,1.572 ; -0.799,-1.496 ccw(c-0.799,-1.996) -1.051,-1.564 cw(c-1.304,-1.132) -1.754,-0.916 ccw(c-2.205,-0.699) -1.705,-0.699 ; -0.799,-1.496 -0.799,-1.496 ; -0.799,1.504 cw(c-0.799,2.004) -1.051,1.572 ccw(c-1.304,1.141) -1.754,0.924 ; -0.799,1.504 -0.799,1.504 ; -1.705,-0.699 -1.705,0.707 ccw(c-2.205,0.707) -1.754,0.924 ; -1.705,-0.699 -1.705,-0.699 ; -1.754,0.924 -1.754,0.924
  silkscreen extent -3.82,-1.79 -2.92,-0.79, body extent -2.94,-1.4 2.94,1.4, height 0.95
SK6812MINI-E#4 [mm]
  rrect10% 1.35x0.82 smd mask+0: 1(2.725,-0.75) 2(-2.725,-0.75) 3(-2.725,0.75) 4(2.725,0.75)
  Keep-Out Layer board cut-out: 1.661,-0.746 1.661,0.659 1.651,0.659 1.651,0.659 1.69,0.855 1.706,0.878 1.715,0.874 1.731,0.898 1.77,1.093 1.731,1.288 1.62,1.454 1.455,1.564 1.26,1.603 1.065,1.564 1.007,1.526 1.008,1.525 1.008,1.524 0.95,1.486 0.755,1.447 0.755,1.447 0.755,1.457 -0.834,1.457 -0.834,1.457 -0.834,1.447 -1.029,1.486 -1.086,1.524 -1.085,1.526 -1.143,1.564 -1.338,1.603 -1.533,1.564 -1.699,1.454 -1.809,1.288 -1.848,1.093 -1.809,0.898 -1.793,0.874 -1.789,0.876 -1.784,0.878 -1.768,0.855 -1.729,0.659 -1.739,0.659 -1.739,-0.746 -1.739,-0.746 -1.729,-0.746 -1.768,-0.941 -1.784,-0.965 -1.789,-0.963 -1.793,-0.961 -1.809,-0.985 -1.848,-1.18 -1.809,-1.375 -1.699,-1.54 -1.533,-1.651 -1.338,-1.69 -1.143,-1.651 -1.085,-1.612 -1.086,-1.611 -1.029,-1.572 -0.834,-1.534 -0.834,-1.534 -0.834,-1.543 0.755,-1.543 0.755,-1.543 0.755,-1.534 0.95,-1.572 1.008,-1.611 1.007,-1.612 1.065,-1.651 1.26,-1.69 1.455,-1.651 1.62,-1.54 1.731,-1.375 1.77,-1.18 1.731,-0.985 1.715,-0.961 1.706,-0.965 1.69,-0.941 1.651,-0.746 1.651,-0.746 1.661,-0.746
  Keep-Out Layer lines w0.05: 1.042,1.572 cw(c0.79,2.004) 0.79,1.504 ; 1.042,1.572 cw(c1.294,1.141) 1.745,0.924 ccw(c2.195,0.707) 1.695,0.707 1.695,-0.699 ccw(c2.195,-0.699) 1.745,-0.916 cw(c1.294,-1.132) 1.042,-1.564 ccw(c0.79,-1.996) 0.79,-1.496 ; 1.042,1.572 1.042,1.572 ; 0.79,1.504 -0.799,1.504 ; 0.79,1.504 0.79,1.504 ; -0.799,1.504 cw(c-0.799,2.004) -1.051,1.572 ccw(c-1.304,1.141) -1.754,0.924 ; -0.799,1.504 -0.799,1.504 ; 0.79,-1.496 0.79,-1.496 ; 0.79,-1.496 -0.799,-1.496 ; -1.754,0.924 cw(c-2.205,0.707) -1.705,0.707 -1.705,-0.699 cw(c-2.205,-0.699) -1.754,-0.916 ccw(c-1.304,-1.132) -1.051,-1.564 cw(c-0.799,-1.996) -0.799,-1.496 ; -1.754,0.924 -1.754,0.924 ; -0.799,-1.496 -0.799,-1.496
  silkscreen extent -3.82,-1.79 -2.92,-0.79, body extent -2.94,-1.4 2.94,1.4, height 0.95
SMD-16_ELV1411A [mm]
  rect 1x1 smd paste+0 mask+0.051: 1(-0.85,-0.85) 2(0.85,-0.85) 3(0.85,0.85) 4(-0.85,0.85)
  rect 1.5x3 smd paste+0 mask+0.051: 5(-6.15,3.45) 10(6.15,3.45) 11(6.15,-3.45) 16(-6.15,-3.45)
  rect 1.2x2.5 smd paste+0 mask+0.051: 6(-3.5,3.35) 7(-0.85,3.35) 8(0.85,3.35) 9(3.5,3.35) 12(3.5,-3.35) 13(0.85,-3.35) 14(-0.85,-3.35) 15(-3.5,-3.35)
  silkscreen extent -7.25,-6.4 7.25,5.75, body extent -7.25,-5.75 7.25,5.75, height 2.5
SolderJumper-2_P1.3mm_Open_TrianglePad1.0x1.5mm [mm]
  rect 0.3x0.3 smd paste-0.3 mask+0: 1(0.725,0) 2(-0.725,0)
  Top Layer region: -0.275,0 0.225,-0.75 1.225,-0.75 1.225,0.75 0.225,0.75
  Top Layer region: -1.225,-0.75 -0.075,-0.75 -0.575,0 -0.075,0.75 -1.225,0.75
  silkscreen extent -1.4,-1 1.4,1
SOLDERJUMPER-2_P1.3MM_OPEN_TRIANGLEPAD1.0X1.5MM [mm]
  rect 0.3x0.3 smd paste-0.3 mask+0: 1(0.725,0) 2(-0.725,0)
  Top Layer region: -1.225,-0.75 -0.075,-0.75 -0.575,0 -0.075,0.75 -1.225,0.75
  Top Layer region: -0.275,0 0.225,-0.75 1.225,-0.75 1.225,0.75 0.225,0.75
  silkscreen extent -1.4,-1 1.4,1
SplitkbTentingPuckWithoutCenterHole [mm]
  round 4.4 hole 2.2 mask+0: 1(-19.05,0) 1(0,19.05) 1(0,-19.05)
  silkscreen extent -20.32,-20.32 7.01,20.32
SSD1306_128X64OLED [mm]
  rrect100% 1.6x2 hole 1 paste-2539.97 mask+0: 1(-3.62,10.6) 2(-1.08,10.6) 3(1.46,10.6) 4(4,10.6)
  silkscreen extent -13.45,-15 13.95,12.3, body extent -13.15,-14.91 13.55,12.95, height 5.02
SW_MSK12C02 [mm]
  rect 0.9x1.25 smd paste+0 mask+0.102: 1(-2.25,2.075) 2(0.75,2.075) 3(2.25,2.075)
  rect 0.8x0.9 smd paste+0 mask+0.102: 4_1(-3.8,1.1) 4_2(-3.8,-1.1) 4_3(3.8,-1.1) 4_4(3.8,1.1)
  round 0.9 hole 0.9 unplated mask+0: ""(-1.5,0) ""(1.5,0)
  silkscreen extent -3.5,-1.4 3.5,3.35, body extent -4,-2.75 4,2.4, height 1.5
SW_PUSH_1P1T-MP_NO_HORIZONTAL_ALPS_SKRTLAE010_BOTH_SIDES [mm]
  rrect25% 0.75x1.8 hole 0.2 mask+0: 1(-1.225,0.9) 1(1.225,0.9)
  rrect25% 0.6x1.8 hole 0.2 mask+0: 2(0,0.9)
  rrect25% 1.3x0.9 hole 0.2 mask+0: MP(-1.85,-1.05) MP(1.85,-1.05)
  round 0.9 hole 0.9 paste-2539.97 mask+0: Un1(-2.125,0) Un2(2.125,0)
  silkscreen extent -2.4,-1.15 2.4,1.5, body extent -2.25,-2.05 2.25,1.5, height 3.31

## Part data
BT1 BT3: library part Battery_Cell, "Conn Shrouded Header (4 Sides) HDR 2 POS 2mm Solder RA Side Entry Thru-Hole Box", Manufacturer=JST, Manufacturer Part Number=S2B-PH-K-S(LF)(SN), Supplier Part Number=C173752, ComponentLink1Description=https://datasheet.octopart.com:443/S2B-PH-K-S%28LF%29%28SN%29-JST-datasheet-180491669.pdf?src-supplier=IHS, ComponentLink1URL=https://datasheet.octopart.com:443/S2B-PH-K-S%28LF%29%28SN%29-JST-datasheet-180491669.pdf?src-supplier=IHS, ComponentLink2Description=https://datasheet.octopart.com:443/S2B-PH-K-S%28LF%29%28SN%29-JST-datasheet-10411123.pdf?src-supplier=Upverter, ComponentLink2URL=https://datasheet.octopart.com:443/S2B-PH-K-S%28LF%29%28SN%29-JST-datasheet-10411123.pdf?src-supplier=Upverter, ComponentLink3Description=https://datasheet.octopart.com:443/S2B-PH-K-S%28LF%29%28SN%29-JST-datasheet-8324864.pdf?src-supplier=Upverter, ComponentLink3URL=https://datasheet.octopart.com:443/S2B-PH-K-S%28LF%29%28SN%29-JST-datasheet-8324864.pdf?src-supplier=Upverter, ComponentLink4Description=https://datasheet.octopart.com:443/S2B-PH-K-S%28LF%29%28SN%29-JST-datasheet-56537.pdf?src-supplier=Upverter, ComponentLink4URL=https://datasheet.octopart.com:443/S2B-PH-K-S%28LF%29%28SN%29-JST-datasheet-56537.pdf?src-supplier=Upverter, ComponentLink5Description=https://datasheet.octopart.com:443/S2B-PH-K-S%28LF%29%28SN%29-JST-datasheet-15068535.pdf?src-supplier=Upverter, ComponentLink5URL=https://datasheet.octopart.com:443/S2B-PH-K-S%28LF%29%28SN%29-JST-datasheet-15068535.pdf?src-supplier=Upverter, ComponentLink6Description=https://datasheet.octopart.com:443/S2B-PH-K-S%28LF%29%28SN%29-JST-datasheet-147762421.pdf?src-supplier=LKR, ComponentLink6URL=https://datasheet.octopart.com:443/S2B-PH-K-S%28LF%29%28SN%29-JST-datasheet-147762421.pdf?src-supplier=LKR, ComponentLink7Description=https://datasheet.octopart.com:443/S2B-PH-K-S%28LF%29%28SN%29-JST-datasheet-12510261.pdf?src-supplier=Future+Electronics, ComponentLink7URL=https://datasheet.octopart.com:443/S2B-PH-K-S%28LF%29%28SN%29-JST-datasheet-12510261.pdf?src-supplier=Future+Electronics, Supplier=LCSC
BZ1 BZ2: "70dB Passive (external drive) Piezoelectric SMD, 9x11mm Buzzers ROHS", Manufacturer=KELIKING, Manufacturer Part Number=KLJ-1102, Supplier Part Number=C201047, Category=Uncategorized, Pricing="1=0.6575, 10=0.5231, 30=0.4559, 100=0.3887, 500=0.3488, 1000=0.328 (USD)", Stock=1162, Supplier=LCSC
C1 C2 C3 C4: Manufacturer=CCTC, Manufacturer Part Number=TCC0402X5R105M100AT, Supplier Part Number=C2887020, Category="Ceramic Capacitors", Supplier=LCSC
D1 D2 D3 D4 D5 D6 D7 D8 D9 D10 D11 D12 D13 D14 D15 D16 D17 D18 D19 D20 D21 D22 D23 D24 D25 D26 D27 D28 D29 D30 D31 D32 D33 D34 D35 D36 D37 D38 D39 D40 D41 D42 D43 D44: "Switching Diodes (Small Signal) SOD123 IR=5μA Io=150mA", Manufacturer=Slkor, Manufacturer Part Number=1N4148W, Supplier Part Number=C444720, Category="Rectifier Diodes", Pricing="100=0.006, 1000=0.0047, 3000=0.0037, 9000=0.0033, 51000=0.0031, 99000=0.003 (USD)", Stock=1538400, Supplier=LCSC
J1 J4: library part "MJ-4PP-9 TRRS", "-20⊥~+70⊥ 3.5mm Headphone Jack 235⊥ 30V 500mA Plugin Audio Connectors (Headphones) ROHS", JLCPCB Part #=C22459514, Manufacturer="XKB Connectivity", Manufacturer Part Number=PJ-320A, Category=Uncategorized, Supplier=LCSC, Supplier Part Number=C22459514
J3 J5: library part Conn_01x05
LED1 LED2 LED3 LED4 LED5 LED6 LED7 LED8 LED9 LED10 LED11 LED12 LED13 LED14 LED15 LED16 LED17 LED19 LED20 LED21 LED22 LED23 LED24 LED25 LED26 LED27 LED28 LED29 LED30 LED31 LED32 LED33 LED34 LED35 LED36 LED37 LED38 LED39 LED40 LED41 LED42 LED43: library part LED-SK6812MINI-E, "Conn Shrouded Header (4 Sides) HDR 2 POS 2mm Solder RA Side Entry Thru-Hole Box", Manufacturer="DONGGUAN OCCIDENTAL OPTOELECTRONICS", Supplier Part Number=C5149201, Category=Uncategorized, Manufacturer Part Number=SK6812MINI-E, Supplier=LCSC
MH1 MH2 MH3 MH4 MH5 MH6 MH7 MH8 MH10 MH11 MH12 MH13 MH14 MH15 MH16 MH17: library part MountingHole
PSW1 PSW2: "Slide Switches SPDT switch length: 8mm, switch width: 2.8mm", Manufacturer="SHOU HAN", Manufacturer Part Number=MSK12C02, Supplier Part Number=C431540, Category=Uncategorized, Pricing="10=0.0566, 100=0.0464, 300=0.0411, 3000=0.0353, 6000=0.0338, 9000=0.0328 (USD)", Stock=128790, Supplier=LCSC
RSW1 RSW2: "Tactile Switch, SKRT, Side Actuated, Surface Mount, Round Button, 160 gf, 50mA at 12VDC", Manufacturer=ALPSALPINE, Manufacturer Part Number=SKRTLAE010, Supplier Part Number=C110293, Category=Uncategorized, Pricing="5=0.1324, 50=0.1079, 150=0.0956, 500=0.0864, 3000=0.0737, 6000=0.0701 (USD)", Stock=34920, Supplier=LCSC
SW1 SW2 SW3 SW4 SW5 SW6 SW7 SW8 SW9 SW10 SW11 SW12 SW13 SW14 SW15 SW16 SW17 SW19 SW20 SW21 SW22 SW23 SW24 SW25 SW26 SW27 SW28 SW29 SW30 SW31 SW32 SW33 SW34 SW35 SW36 SW37 SW38 SW39 SW40 SW41 SW42 SW43: library part SW_PUSH-MX_SOCKET, Manufacturer=HanElectricity, Manufacturer Part Number=CPG151101S11-16, Supplier Part Number=C41430893, Category=Uncategorized, Supplier=LCSC
SW18 SW44: "Mechanical Encoder Rotary Incremental Flat 0.01N.m Straight Quadrature Digital Square Wave 15PPR Through Hole PC Pin...", Manufacturer=ALPSALPINE, Manufacturer Part Number=EC11N1525404, Supplier Part Number=C470748, Category="Decoders and Multiplexers", Pricing="1=2.7421, 10=2.3608, 30=2.1232, 120=1.7807, 480=1.6708, 960=1.6223, 2040=1.6046, 4800=1.5916 (USD)", Stock=3732, Supplier=LCSC
U3 U5: library part DRV2605, "IC MOTOR DRIVER 2V-5.2V 10VSSOP", Case/Package=VSSOP, Manufacturer=TI, Manufacturer Part Number=DRV2605LDGST, Max Operating Temperature=105°C, Max Supply Voltage=5.2V, Min Operating Temperature=-40°C, Min Supply Voltage=2V, Quiescent Current=500uA, Supplier Part Number=C425927, Interface=I2C, Lead Free="Lead Free", Logic Function="AND GATE", Mount="Surface Mount", Number of Pins=10, Packaging="Cut Tape", REACH SVHC="No SVHC", RoHS Compliant=Yes, Supplier=LCSC
U4 U6: "11mm x 14mm Rectangular Linear Vibration Motor Model NFP-ELV1411A-A1", JLCPCB Part Class="Extended Part", Manufacturer="JLCPCB Assembly", Supplier Part Number=C9900029336, Contributor=lcsc, Manufacturer Part Number=ELV1411A, spicePre=U, spiceSymbolName=ELV1411A, Supplier=LCSC
JP26 JP29: ki_fp_filters=SolderJumper*Open*

## Free pads (board coordinates)
  round 1.9 hole 1.9 unplated: ""(-135.198,-17.792) ""(-131.918,-36.592) ""(-125.192,-16.028) ""(-121.912,-34.828) ""(-118.938,-0.712) ""(-115.615,-19.41) ""(-112.328,-38.272) ""(-108.932,1.052) ""(-105.609,-17.645) ""(-102.322,-36.508) ""(-97.208,14.376) ""(-95.833,-4.664) ""(-94.573,-23.694) ""(-87.072,15.084) ""(-85.697,-3.956) ""(-84.437,-22.986) ""(-75.425,25.11) ""(-75.411,-12.968) ""(-75.411,6.105) ""(-65.265,25.11) ""(-65.251,-12.968) ""(-65.251,6.105) ""(-59.319,-44.016) ""(-56.396,-2.988) ""(-56.385,16.13) ""(-56.382,-22.006) ""(-49.159,-44.016) ""(-46.236,-2.988) ""(-46.225,16.13) ""(-46.222,-22.006) ""(-38.042,-45.545) ""(-37.385,13.15) ""(-37.383,-5.943) ""(-37.366,-25.058) ""(-28.228,-48.175) ""(-27.225,13.15) ""(-27.223,-5.943) ""(-27.206,-25.058) ""(-17.862,-52.508) ""(-9.063,-57.588) ""(-0.207,-64.508) ""(6.977,-71.692) ""(31.943,-71.692) ""(39.127,-64.508) ""(47.983,-57.588) ""(56.782,-52.508) ""(66.126,-25.058) ""(66.143,-5.943) ""(66.166,13.112) ""(67.148,-48.175) ""(76.286,-25.058) ""(76.303,-5.943) ""(76.326,13.112) ""(76.962,-45.545) ""(85.142,-22.006) ""(85.156,-2.988) ""(85.166,16.092) ""(88.106,-44.028) ""(95.302,-22.006) ""(95.316,-2.988) ""(95.326,16.092) ""(98.266,-44.028) ""(104.192,-13.006) ""(104.192,6.066) ""(104.206,25.072) ""(114.352,-13.006) ""(114.352,6.066) ""(114.366,25.072) ""(123.357,-22.986) ""(124.617,-3.956) ""(125.977,15.024) ""(133.493,-23.694) ""(134.753,-4.664) ""(136.113,14.316) ""(141.242,-36.508) ""(144.529,-17.645) ""(147.852,1.052) ""(151.248,-38.272) ""(154.535,-19.41) ""(157.858,-0.712) ""(160.832,-34.828) ""(164.112,-16.028) ""(170.838,-36.592) ""(174.118,-17.792)
  round 1.7 hole 1.7 unplated: ""(-134.627,-17.691) ""(-131.347,-36.491) ""(-125.763,-16.129) ""(-122.483,-34.929) ""(-118.367,-0.611) ""(-115.044,-19.309) ""(-111.757,-38.171) ""(-109.503,0.951) ""(-106.18,-17.746) ""(-102.893,-36.609) ""(-96.629,14.416) ""(-95.254,-4.624) ""(-93.994,-23.654) ""(-87.651,15.044) ""(-86.276,-3.996) ""(-85.016,-23.026) ""(-74.845,25.11) ""(-74.831,-12.968) ""(-74.831,6.105) ""(-65.845,25.11) ""(-65.831,-12.968) ""(-65.831,6.105) ""(-58.739,-44.016) ""(-55.816,-2.988) ""(-55.805,16.13) ""(-55.802,-22.006) ""(-49.739,-44.016) ""(-46.816,-2.988) ""(-46.805,16.13) ""(-46.802,-22.006) ""(-37.482,-45.695) ""(-36.805,13.15) ""(-36.803,-5.943) ""(-36.786,-25.058) ""(-28.788,-48.025) ""(-27.805,13.15) ""(-27.803,-5.943) ""(-27.786,-25.058) ""(-17.36,-52.798) ""(-9.566,-57.298) ""(0.203,-64.918) ""(6.567,-71.282) ""(32.353,-71.282) ""(38.717,-64.918) ""(48.486,-57.298) ""(56.28,-52.798) ""(66.706,-25.058) ""(66.723,-5.943) ""(66.746,13.112) ""(67.708,-48.025) ""(75.706,-25.058) ""(75.723,-5.943) ""(75.746,13.112) ""(76.402,-45.695) ""(85.722,-22.006) ""(85.736,-2.988) ""(85.746,16.092) ""(88.686,-44.028) ""(94.722,-22.006) ""(94.736,-2.988) ""(94.746,16.092) ""(97.686,-44.028) ""(104.772,-13.006) ""(104.772,6.066) ""(104.786,25.072) ""(113.772,-13.006) ""(113.772,6.066) ""(113.786,25.072) ""(123.936,-23.026) ""(125.196,-3.996) ""(126.556,14.984) ""(132.914,-23.654) ""(134.174,-4.624) ""(135.534,14.356) ""(141.813,-36.609) ""(145.1,-17.746) ""(148.423,0.951) ""(150.677,-38.171) ""(153.964,-19.309) ""(157.287,-0.611) ""(161.403,-34.929) ""(164.683,-16.129) ""(170.267,-36.491) ""(173.547,-17.691)
  round 4.1 hole 4.1 unplated: ""(-130.195,-16.91) ""(-126.915,-35.71) ""(-113.935,0.17) ""(-110.612,-18.528) ""(-107.325,-37.39) ""(-92.14,14.73) ""(-90.765,-4.31) ""(-89.505,-23.34) ""(-70.345,25.11) ""(-70.331,-12.968) ""(-70.331,6.105) ""(-54.239,-44.016) ""(-51.316,-2.988) ""(-51.305,16.13) ""(-51.302,-22.006) ""(-33.135,-46.86) ""(-32.305,13.15) ""(-32.303,-5.943) ""(-32.286,-25.058) ""(-13.463,-55.048) ""(3.385,-68.1) ""(35.535,-68.1) ""(52.383,-55.048) ""(71.206,-25.058) ""(71.223,-5.943) ""(71.246,13.112) ""(72.055,-46.86) ""(90.222,-22.006) ""(90.236,-2.988) ""(90.246,16.092) ""(93.186,-44.028) ""(109.272,-13.006) ""(109.272,6.066) ""(109.286,25.072) ""(128.425,-23.34) ""(129.685,-4.31) ""(131.045,14.67) ""(146.245,-37.39) ""(149.532,-18.528) ""(152.855,0.17) ""(165.835,-35.71) ""(169.115,-16.91)

## Via types
v1: diameter 1.27, hole 0.711, Top Layer to Bottom Layer, 194 vias